# Altium PCB RHC12.PcbDoc
Units mil, origin at the board's own origin, x right, y up, seen from the top; angles counter-clockwise.
Board outline 787.4 x 787.4 mil, 2 copper layers (Top, Bottom), stack 61.811 mil thick; 8 components, 7 nets, 26 pads, 1 vias.
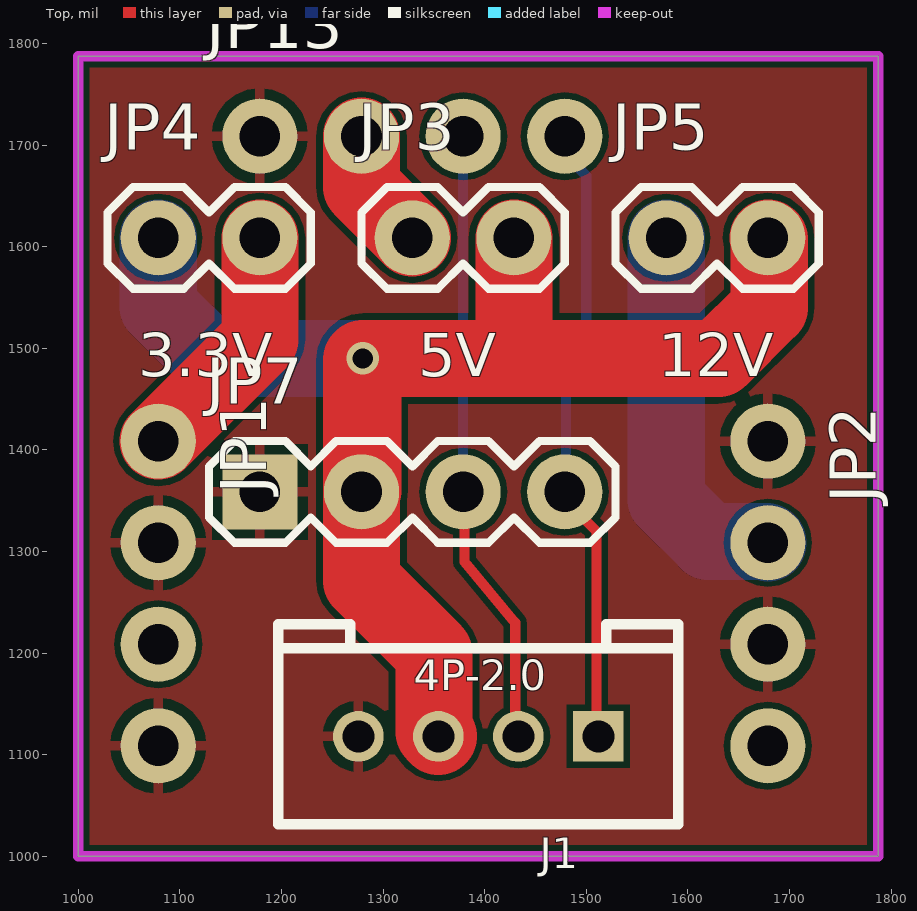
[diagram p0: Top view]
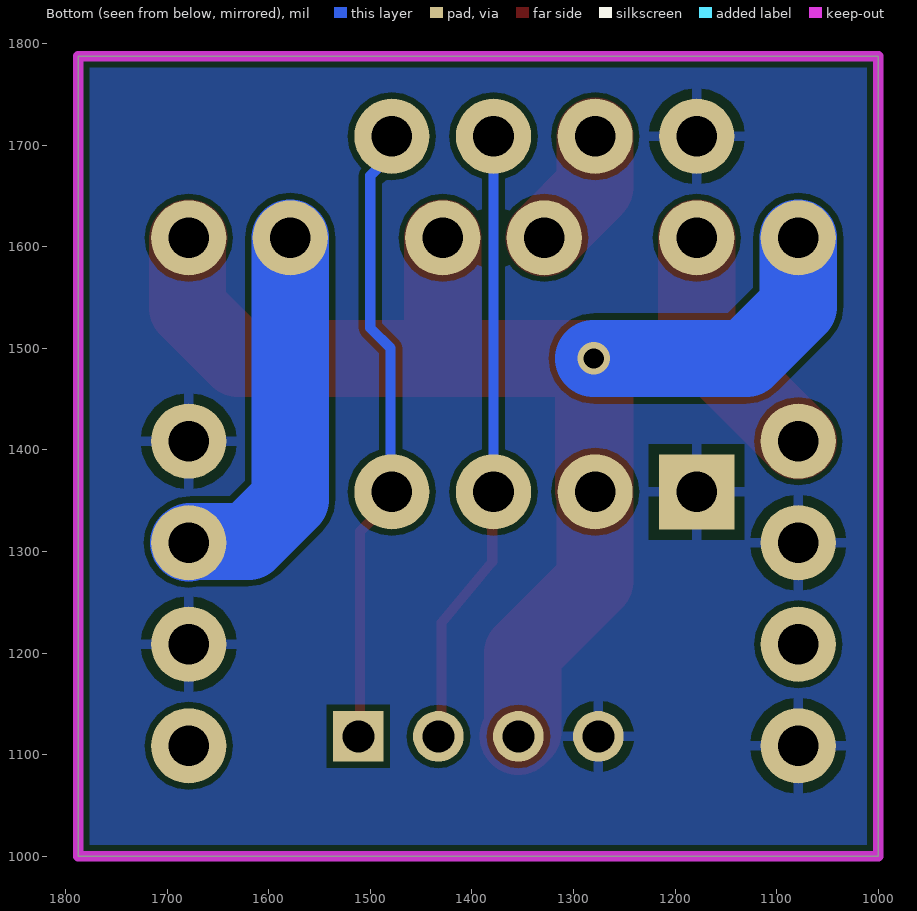
[diagram p1: Bottom view, seen from below]

## Layer stack, top to bottom
Top Solder: solder mask 0.4, Solder Resist, Dk 3.5
Top: signal copper 1.378
Dielectric 1: core 59.0551, FR-4, Dk 4.8
Bottom: signal copper 1.378
Bottom Solder: solder mask 0.4, Solder Resist, Dk 3.5

## Board outline
1000,1000 1787.4,1000 1787.4,1787.4 1000,1787.4

## Design rules (kind name [scope] priority, off if disabled: settings)
Clearance [All] p1: gap=6
Clearance "Clearance (Same Net)" [All] p2: gap=0
HoleSize HoleSize_1 [All] p1: absolutevalues=TRUE maxlimit=100000 minlimit=12 maxpercent=80.000 minpercent=20.000
HoleSize [All] p2: absolutevalues=TRUE maxlimit=100 minlimit=1 maxpercent=80.000 minpercent=20.000
HoleToHoleClearance mdViaViaSameLayer [All] p1: gap=8 allowstackedmicrovias=TRUE
HoleToHoleClearance [All] p2: gap=10 allowstackedmicrovias=TRUE
PasteMaskExpansion mlMinCreamFrame [All] p1: expansion=0
PasteMaskExpansion [All] p2: expansion=0
PolygonConnect ThermalVias [IsVia] p1: connectstyle=Direct reliefconductorwidth=10 reliefentries=4 polygonreliefangle="90 Angle" airgapwidth=10
PolygonConnect [All] p2: connectstyle=Relief reliefconductorwidth=10 reliefentries=4 polygonreliefangle="90 Angle" airgapwidth=10
RoutingVias [All] p1: holewidth=28 width=50 viastyle="Through Hole" minholewidth=28 minwidth=50 maxholewidth=28 maxwidth=50
SilkToSilkClearance [All] p1 off: silktosilkclearance=10
SilkToSolderMaskClearance [IsPad] p1 off: minsilkscreentomaskgap=10 clearancetoexposedcopper=TRUE
SolderMaskExpansion mlMinStopFrame [All] p1: expansion=2
SolderMaskExpansion [All] p2: expansion=4
Width Width_1 [All] p1: maxlimit=100000 minlimit=6 preferedwidth=10
Width [All] p2: maxlimit=10 minlimit=10 preferedwidth=10
25 further rules are at their usual default settings.

## Components (designator, comment, footprint, x,y, rotation, side; value= is the part's Value field where it differs from the comment)
J1 "4P-2.0" HW4-2.0 1393.7,1118.11 r180 top
JP1 "" 1X04_NO_SILK_ALL_ROUND 1078.74,1408.66 r270 top
JP2 "" 1X04_NO_SILK_ALL_ROUND 1678.74,1408.66 r270 top
JP3 "" 1X02 1328.74,1608.66 r0 top
JP4 "" 1X02 1078.74,1608.66 r0 top
JP5 "" 1X02 1578.74,1608.66 r0 top
JP7 "" 1X04 1178.74,1358.66 r0 top
JP13 "" 1X04_NO_SILK_ALL_ROUND 1178.74,1708.66 r0 top

## Footprints (in the part's own frame and the unit in brackets; to place one, negate y for a bottom-side part, rotate by r counter-clockwise, add the part's x,y. Pads: shape width x height; smd on the part's side, far side on the other; paste and mask are expansions set on the pad)
1X02 [mil] "1X02"
  round 74 hole 40: 1(0,0) 2(100,0)
  silkscreen extent -50,-50 150,50
1X04 [mil] "1X04"
  rect 74x74 hole 40: 1(0,0)
  round 74 hole 40: 2(100,0) 3(200,0) 4(300,0)
  silkscreen extent -50,-50 350,50
1X04_NO_SILK_ALL_ROUND [mil] "1X04_NO_SILK_ALL_ROUND"
  round 74 hole 40: 1(0,0) 2(100,0) 3(200,0) 4(300,0)
HW4-2.0 [mil] "HW4-2.0"
  rect 50x50 hole 31.5: 1(-118.11,0)
  round 50 hole 31.5: 2(-39.37,0) 3(39.37,0) 4(118.11,0)
  silkscreen extent -197,-110 197,87

## Part data
J1: library part HW4-2.0
JP1 JP2 JP13: library part 1X04_NO_SILK_ALL_ROUND
JP3 JP4 JP5: library part 1X02
JP7: library part 1X04

## Via types
v1: diameter 32/32 (per signal layer), hole 20, Top to Bottom, 1 vias

## Nets (pads, with @x,y where several pads share a name; then routed paths per layer and width w, separated by ;. In a path a pad name is that pad's centre, name@x,y a point inside that pad or via, vN(x,y) a via of type N, cw(c..) or ccw(c..) an arc to the next point about the centre after c; other vN are vias at no path point)
3.3V: JP1.1 JP4.2 | length 241.4
  Top w76: JP1.1 1178.74,1508.66 JP4.2
5V: JP3.1 JP13.2 | length 120.7
  Top w76: JP13.2 1278.74,1658.66 JP3.1
12V: JP2.2 JP5.1 | length 375
  Bottom w76: JP5.1 1578.74,1351.26 1620,1310 1677.4,1310 JP2.2
GND: J1.4 JP1.2 JP1.4 JP2.1 JP2.3 JP7.1 JP13.1
S1: J1.2 JP7.3 JP13.3 | length 611.7
  Top w10: JP7.3@1380,1360 1380,1290 1430,1230 1430,1120 J1.2
  Bottom w10: JP7.3 JP13.3
S2: J1.1 JP7.4 JP13.4 | length 621.4
  Top w10: JP7.4 1480,1350 1510,1320 1510,1120 J1.1
  Bottom w10: JP7.4 1480,1359.92 1480,1500 1500,1520 1500,1670 1478.74,1691.26 JP13.4
VIN: J1.3 JP3.2 JP4.1 JP5.2 JP7.2 | length 1438.7
  Top w76: J1.3 1350,1122.44 1350,1200 1278.74,1271.26 JP7.2 ; JP3.2 1428.74,1501.26 1440,1490 ; JP5.2 1680,1607.4 1680,1540 1630,1490 1440,1490 ; JP7.2 1280,1359.92 v1(1280,1490) ; JP7.2 1278.74,1488.74 v1(1280,1490) ; v1(1280,1490) 1440,1490
  Bottom w76: JP4.1 1078.74,1541.26 1130,1490 v1(1280,1490)
pads on no net: JP1.3 JP2.4

## Polygon pours and split planes (outlines as drawn)
GND on Bottom "Bottom-GND" (hatched 90Degree grid 0.1 track 0.1, remove dead copper, pour order 0): 995,995 1792.4,995 1792.4,1792.4 995,1792.4
GND on Top "Top-GND" (hatched 90Degree grid 0.1 track 0.1, remove dead copper, pour order 2): 995,995 1792.4,995 1792.4,1792.4 995,1792.4

## Keep-outs
Keep-Out Layer:
  the board outline again, w10

## Silkscreen, mask and mechanical layers (free items; w line width, h text height)
Top Overlay:
  text "3.3V" at 1059.06,1472.44 h42.5
  text "5V" at 1334.65,1472.44 h42.5
  text "12V" at 1570.87,1472.44 h42.5
Dimension:
  the board outline again, w10
Unrouted:
  lines w0: 1378.74,1358.66 1380,1360